# Altium PCB Board1.PcbDoc
Units mil, origin at the board's own origin, x right, y up, seen from the top; angles counter-clockwise.
Board outline 2780 x 2625 mil, 2 copper layers (Top Layer, Bottom Layer); 14 components, 13 nets, 38 pads, 16 vias.
Unrouted connection lines stored in the file: 1.
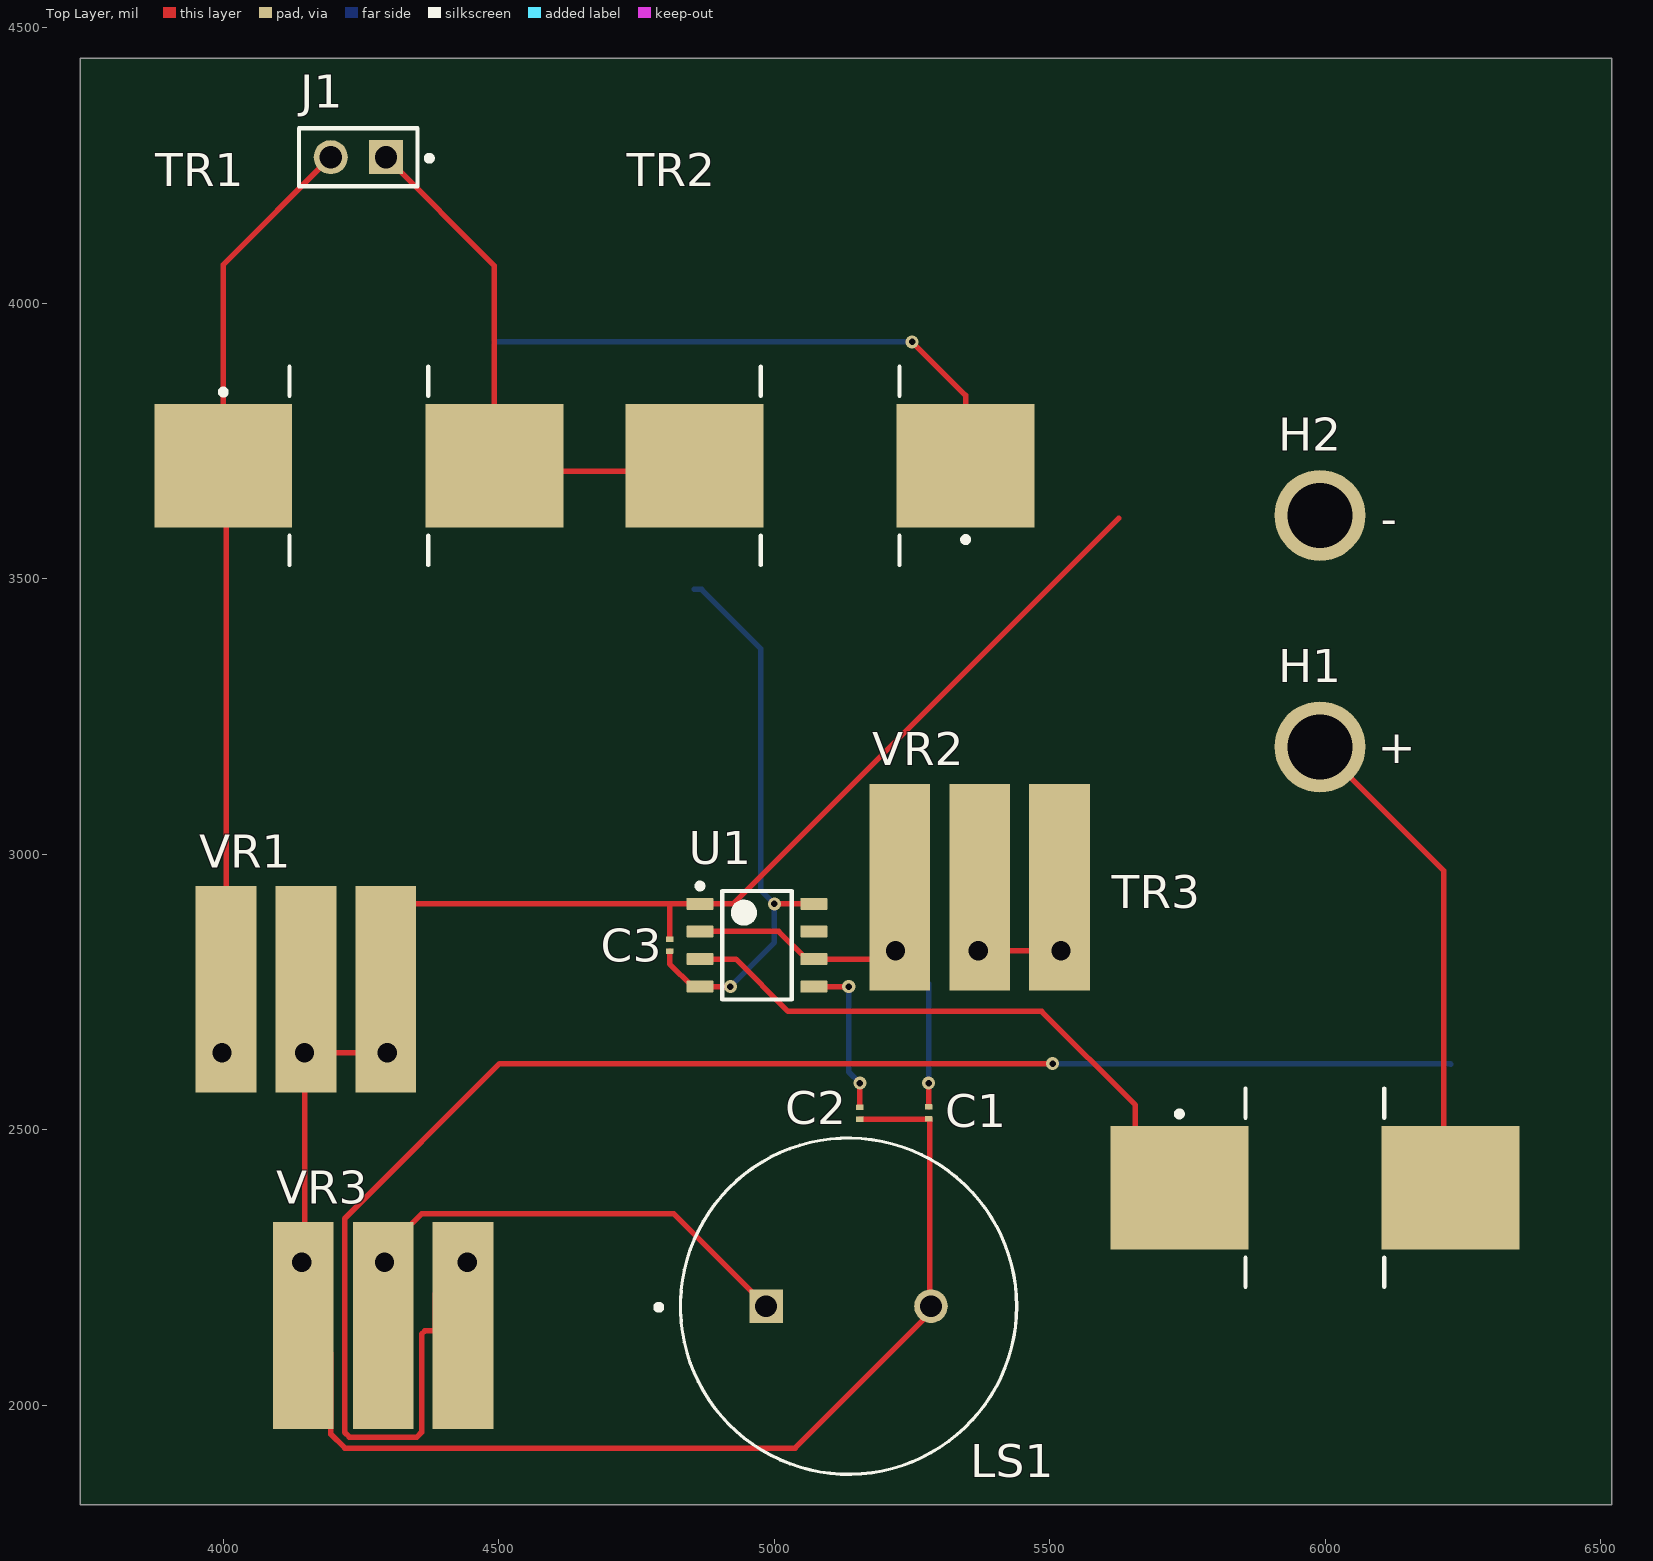
[diagram p0: Top Layer view]
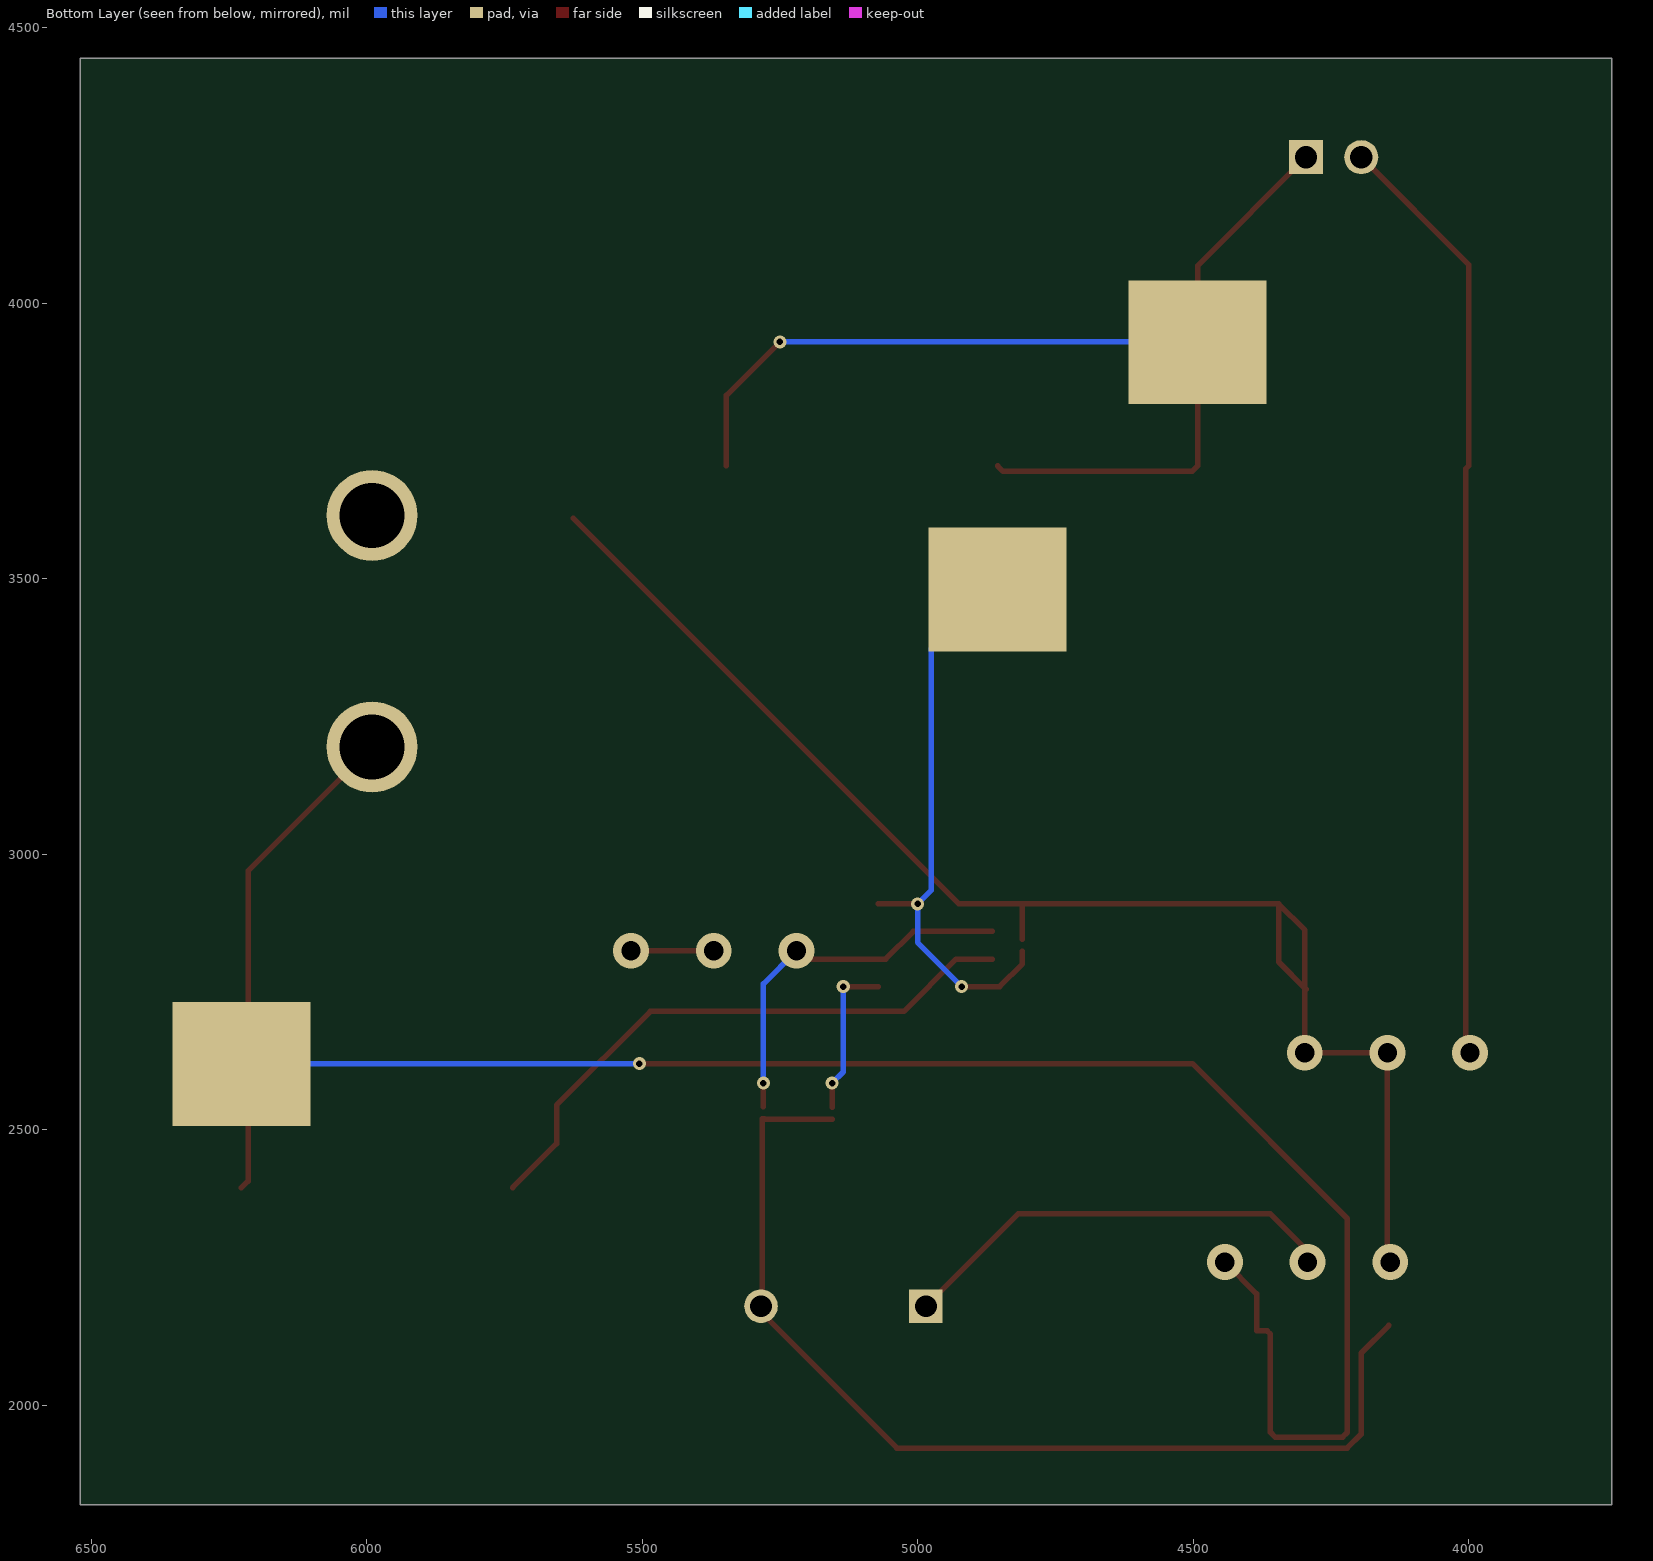
[diagram p1: Bottom Layer view, seen from below]
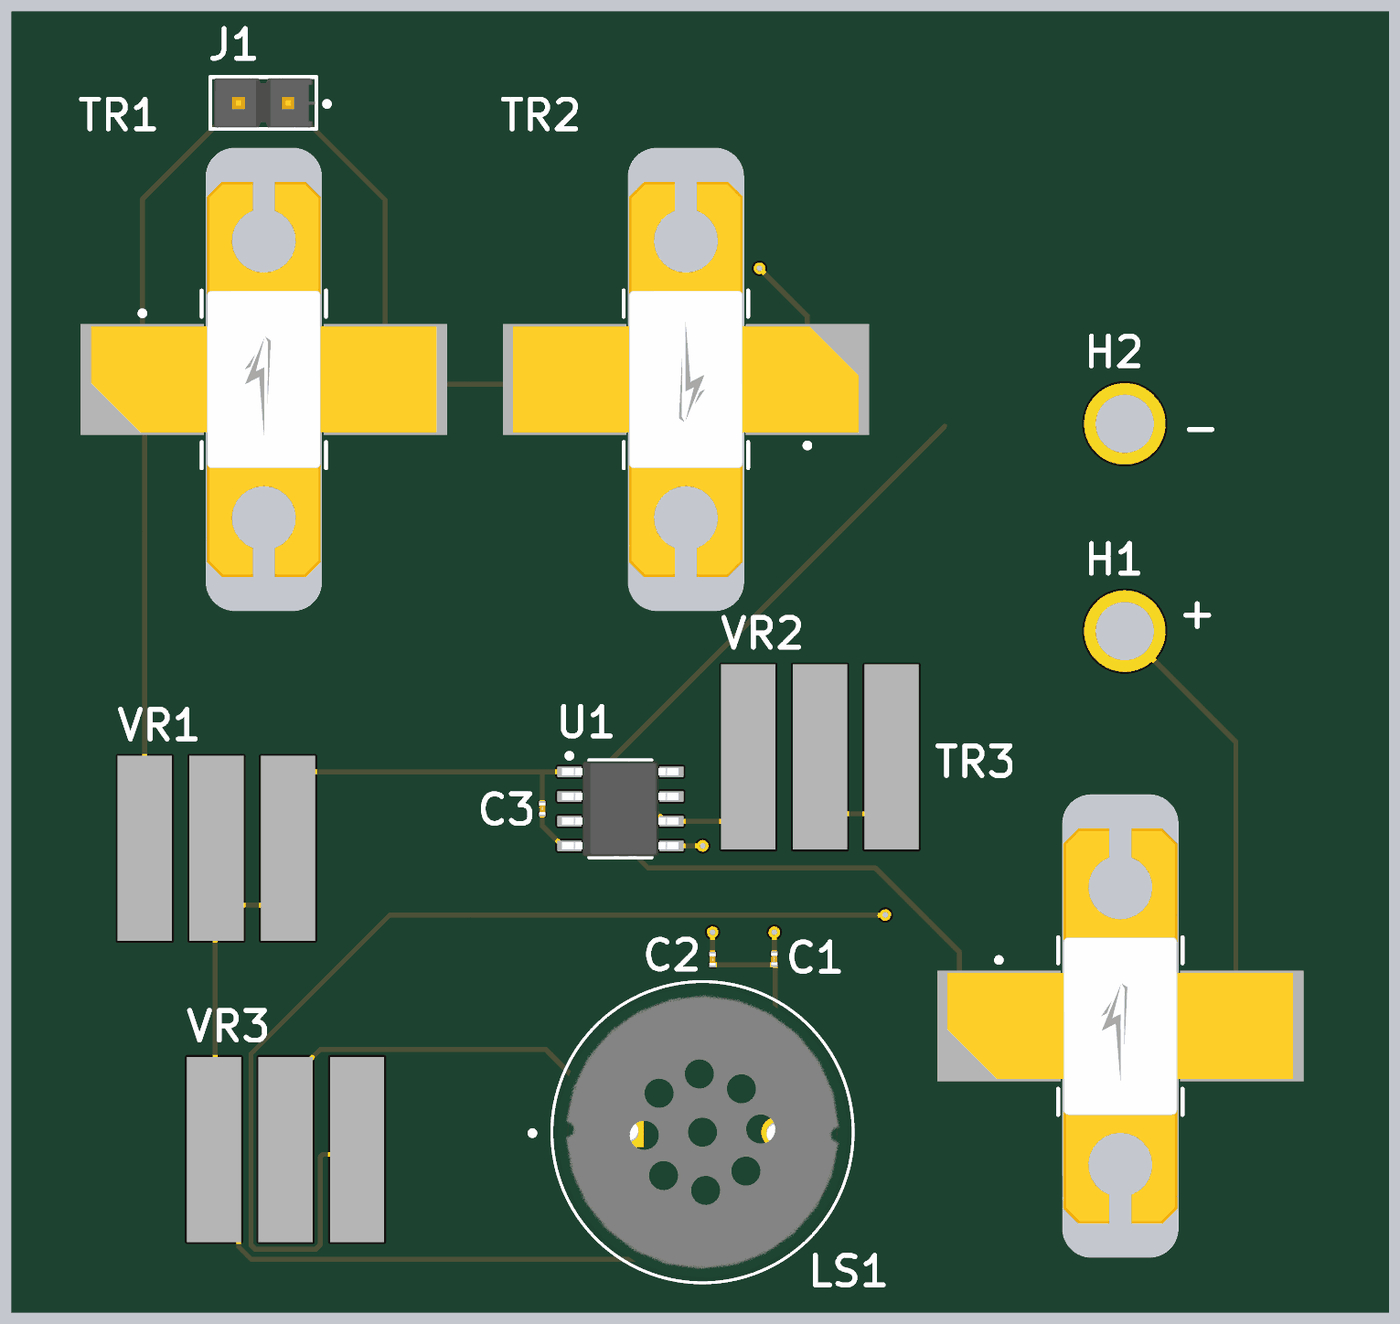
[diagram p2: 3D render of the assembled board from above, using the file's embedded part models]

## Layer stack, top to bottom
Top Solder: solder mask 0.4, Solder Resist, Dk 3.5
Top Layer: signal copper 1.4
Dielectric 1: dielectric 12.6, FR-4, Dk 4.8
Bottom Layer: signal copper 1.4
Bottom Solder: solder mask 0.4, Solder Resist, Dk 3.5

## Board outline
3740,1820 3740,4445 6520,4445 6520,1820

## Design rules (kind name [scope] priority, off if disabled: settings)
Clearance [All] p1: gap=10 ignorepadtopadclearanceinfootprint=FALSE
PolygonConnect [All] p1: connectstyle=Relief reliefconductorwidth=10 reliefentries=4 polygonreliefangle="90 Angle" airgapwidth=10
RoutingVias [All] p1: holewidth=12 width=24 viastyle="Through Hole" minholewidth=10 minwidth=24 maxholewidth=16 maxwidth=50
SolderMaskExpansion [All] p1: expansion=4 istentingtop=FALSE
SupplyNets "Schematic Supply Nets" [InNet('GND')] p1: voltage=0.000
Width [All] p1: maxlimit=10 minlimit=10 preferedwidth=10
30 further rules are at their usual default settings.

## Components (designator, comment, footprint, x,y, rotation, side; value= is the part's Value field where it differs from the comment)
C1 "1nF" CAP_0201 5280,2530.83 r90 top
C2 "10nF" CAP_0201 5155,2530 r270 top
C3 "100nF" CAP_0201 4810,2835 r90 top
H1 "Hole 3mm" "Hole 3mm" 5990,3195 r0 top
H2 "Hole 3mm" "Hole 3mm" 5990,3615 r0 top
J1 "TSW-102-22-G-S" FP-TSW-102-22-G-S-MFG 4245,4265 r180 top
LS1 "CVS-1508" FP-CVS-1508-MFG 5134.61,2180 r0 top value=8Ω
TR1 "CGH35060F1" FP-440193-IPC_C 4246.03,3705 r0 top
TR2 "CGH35060F1" FP-440193-IPC_C 5101.03,3705 r180 top
TR3 "CGH35060F1" FP-440193-IPC_C 5981.03,2395 r0 top
U1 "LM555CM" D0008A_L 4968.35,2835 r0 top
VR1 "RPot_7" CT2260-ND 4222.5,2755 r180 top value=10K
VR2 "RPot_7" CT2260-ND 5445,2940 r180 top value=3M
VR3 "RPot_7" CT2260-ND 4217.5,2145 r0 top value="10K, LOG"

## Footprints (in the part's own frame and the unit in brackets; to place one, negate y for a bottom-side part, rotate by r counter-clockwise, add the part's x,y. Pads: shape width x height; smd on the part's side, far side on the other; paste and mask are expansions set on the pad)
CAP_0201 [mm]
  rrect25% 0.25x0.35 smd mask+0.05: 1(-0.275,0) 2(0.275,0)
  body extent -0.32,-0.17 0.32,0.16, height 0.34
CT2260-ND [mil]
  rect 110x375 smd: 1(-72.5,0) 2(72.5,0) 3(217.5,0)
D0008A_L [mm] "SOIC, 8-Leads, Body 5x4mm, Pitch 1.27mm, IPC High Density"
  rrect18% 1.25x0.55 smd: 1(-2.625,1.905) 2(-2.625,0.635) 3(-2.625,-0.635) 4(-2.625,-1.905) 5(2.625,-1.905) 6(2.625,-0.635) 7(2.625,0.635) 8(2.625,1.905)
  silkscreen extent -2.75,-2.5 1.6,2.85, body extent -3,-2.45 3,2.45, height 1.63
FP-440193-IPC_C [mm]
  rect 6.352x5.7 smd paste+0 mask+0: 1(-6.249,0) 2(6.249,0)
  rect 6.352x5.7 smd far side paste+0 mask+0: 3(6.249,5.7)
  silkscreen extent -6.37,-4.57 3.2,4.57, body extent -3.1,-12.02 9.53,12.02, height 0.25
FP-CVS-1508-MFG [mm]
  rect 1.55x1.55 hole 1 paste-2539.97 mask+0: 1(-3.8,0)
  round 1.55 hole 1 paste-2539.97 mask+0: 2(3.8,0)
  silkscreen extent -8.87,-7.75 7.75,7.75, body extent -7.85,-7.85 7.85,7.85, height 0.25
FP-TSW-102-22-G-S-MFG [mm]
  rect 1.57x1.57 hole 1.02 paste-2539.97 mask+0: 1(-1.27,0)
  round 1.57 hole 1.02 paste-2539.97 mask+0: 2(1.27,0)
  silkscreen extent -3.4,-1.34 2.73,1.34, body extent -2.83,-1.44 2.83,1.44, height 0.25
"Hole 3mm" [mil]
  round 165 hole 118.11: 1(0,0)

## Part data
C1 C2 C3: library part CAP_0201, "Capacitor SMD 0201"
J1: library part CMP-02766-000117-1, "CONN HEADER VERT 2POS 2.54MM", Housing Color=Black, Max Current Rating=7.6A, Max Operating Temperature=125°C, Max Voltage Rating (AC)=550V, Min Operating Temperature=-55°C, Contact Material=Bronze, Contact Plating=Gold, Depth=2.54mm, Gender=Male, Housing Material=Polyester, Length=5.08mm, Number of Contacts=2, Number of Rows=1, Orientation=Straight, Packaging=Bulk, Pitch=2.54mm, Radiation Hardening=No, REACH SVHC="No SVHC", Termination=Solder
LS1: library part CMP-14846-000001-1, "SPEAKER 8OHM 300MW TOP PORT 87DB", Frequency=1700Hz, Manufacturer="CUI Inc", Resistance=8Ω, Temperature="-20°C to +55°C", Temperature Range High=+55°C, Temperature Range Low=-20°C, Automotive=No, Category=Speak, ComponentLink2Description=Datasheet, ComponentLink2URL=https://www.cui.com/product/resource/cvs-1508.pdf, Device Class L1=Electromechanical, Device Class L2="Audio Products", Device Class L3=Speakers, Digikey Description="SPEAKER 8OHM 300MW TOP PORT 87DB", Height=8mm, Lead Free=Yes, Manufacturer Part Number=CVS-1508, Mouser Description="Speakers & Transducers Speakers", Octopart=https://octopart.com/cvs-1508-cui-21325683, Package=CVS-1508, RoHS=TRUE
TR1 TR2 TR3: library part CMP-240936-000107-1, "RF Mosfet HEMT 28 V 250 mA 3.3-3.6GHz 11.5dB 60W 440193"
U1: library part CMP-0056-00108-3, "Timer, 8-pin Narrow SOIC", Manufacturer="Texas Instruments", PackageTopMarking=NSZXTT*LM*555CM, PowerWise=N, Code_IPC=SOIC127P600-8, Code_JEDEC=MS-012-AA, ComponentLink1Description="Datasheet URL", ComponentLink1URL=http://www.ti.com/general/docs/lit/getliterature.tsp?genericPartNumber=LM555&fileType=pdf, CompType="Analog IC", PackageDescription="SOIC Narrow, 4.9 x 3.9 x 1.45mm, 8 Lead, 1.27mm Pitch", PackageReference=D0008A, PinCount=8, RoHS=N
VR1 VR2 VR3: library part RPot_4, "Potentiometer", LatestRevisionDate=17-Jul-2002, LatestRevisionNote="Re-released for DXP Platform.", PackageDescription="Variable Resistor, Thru-Hole; 3 Leads", PackageReference=VR5, Published=8-Jun-2000, Publisher="Altium Limited", Set Position=0.5, Sim Note="Enter the Resistance value and the set point into parameter fields."

## Via types
v1: diameter 65, hole 35, Top Layer to Bottom Layer, 9 vias
v2: diameter 23.62, hole 11.81, Top Layer to Bottom Layer, 7 vias

## Nets (pads, with @x,y where several pads share a name; then routed paths per layer and width w, separated by ;. In a path a pad name is that pad's centre, name@x,y a point inside that pad or via, vN(x,y) a via of type N, cw(c..) or ccw(c..) an arc to the next point about the centre after c; other vN are vias at no path point)
GND: C1.1 C2.2 C3.2 H2.1 LS1.2 U1.1 VR1.1 VR1.2 VR3.1 | length 4523.1
  Top Layer w10: VR3.1 4195,2095 4195,1948 4220.5,1922.5 5037.5,1922.5 5284.21,2169.21 LS1.2 5281.89,2182.32 5281.89,2519.92 5281.81,2520 C1.1 5278.19,2520 5277.36,2519.17 C2.2 ; VR3.1@4147.5,2265 v1(4147.5,2640) v1(4297.5,2640) 4297.5,2862.5 VR1.1@4345,2910 ; VR1.1 4345,2805 VR1.1@4345,2910 ; C3.2 4810,2910 ; 5625,3610 4925,2910 U1.1 4810,2910 ; VR1.1@4345,2910 4810,2910
  other v1: 4142.5,2260
NetC1_2: C1.2 U1.2 U1.6 VR2.3 | length 690.1
  Top Layer w10: U1.2 5007.91,2860 5057.91,2810 U1.6 5205,2810 v1(5220,2825) ; C1.2 v2(5280,2585)
  Bottom Layer w10: v1(5220,2825) 5280,2765 v2(5280,2585)
NetC2_1: C2.1 U1.5 | length 290.8
  Top Layer w10: U1.5 v2(5135,2760) ; C2.1 v2(5155,2585)
  Bottom Layer w10: v2(5135,2760) 5135,2605 v2(5155,2585)
NetC3_1: C3.1 TR2.3 U1.4 U1.8 | length 1043
  Top Layer w10: C3.1 4810,2801.22 4851.22,2760 U1.4 v2(4920,2760) ; v2(5000,2910) U1.8
  Bottom Layer w10: TR2.3 4867.83,3480.59 4975.03,3373.39 4975.03,2934.97 v2(5000,2910) 5000,2840 v2(4920,2760)
NetLS1_1: LS1.1 VR3.2 | length 809.8
  Top Layer w10: v1(4292.5,2260) 4292.5,2280 4360,2347.5 4817.5,2347.5 4898.84,2266.16 LS1.1
NetR1_2: U1.7
NetR2_1: VR2.1 VR2.2 | length 150
  Top Layer w10: v1(5370,2825) v1(5520,2825)
NetR3_1: TR3.1 U1.3 | length 1082.9
  Top Layer w10: U1.3 4930,2810 5025,2715 5485,2715 5655,2545 5655,2475 TR3.1
NetTR1_3: TR1.3 TR2.1 | length 1023.4
  Top Layer w10: v2(5250,3930) 5347.06,3832.94 TR2.1
  Bottom Layer w10: TR1.3 4492.65,3930 v2(5250,3930)
NetTR3_3: TR3.3 VR3.3 | length 3012.6
  Top Layer w10: v1(4442.5,2260) 4385,2202.5 4385,2135 4365.86,2135 4360,2129.14 4360,1951.29 4351.21,1942.5 4228.79,1942.5 4220,1951.29 4220,2338.71 4501.29,2620 v2(5505,2620)
  Bottom Layer w10: v2(5505,2620) 6226.47,2620 TR3.3
SENSE+: J1.1 TR1.2 TR2.2 | length 1012.8
  Top Layer w10: J1.1 4492.06,4067.94 TR1.2 4502.06,3695 4845,3695 TR2.2
SENSE-: J1.2 TR1.1 VR1.3 | length 1710.9
  Top Layer w10: v1(3997.5,2640) 4005,2647.5 4005,3700 TR1.1 4000,4070 J1.2
Vcc: H1.1 TR3.2 | length 898.2
  Top Layer w10: H1.1 6215,2970 6215,2407.06 TR3.2

## Silkscreen, mask and mechanical layers (free items; w line width, h text height)
Top Overlay:
  text "-" at 6100,3580.01 h60
  text "+" at 6095,3165 h60
Board:
  the board outline again, w10